# Altium PCB pcb.PcbDoc
Units mil, origin at the board's own origin, x right, y up, seen from the top; angles counter-clockwise.
Board outline 6000 x 4000 mil, 2 copper layers (Top Layer, Bottom Layer); 21 components, 21 nets, 122 pads, 0 vias.
Unrouted connection lines stored in the file: 63.
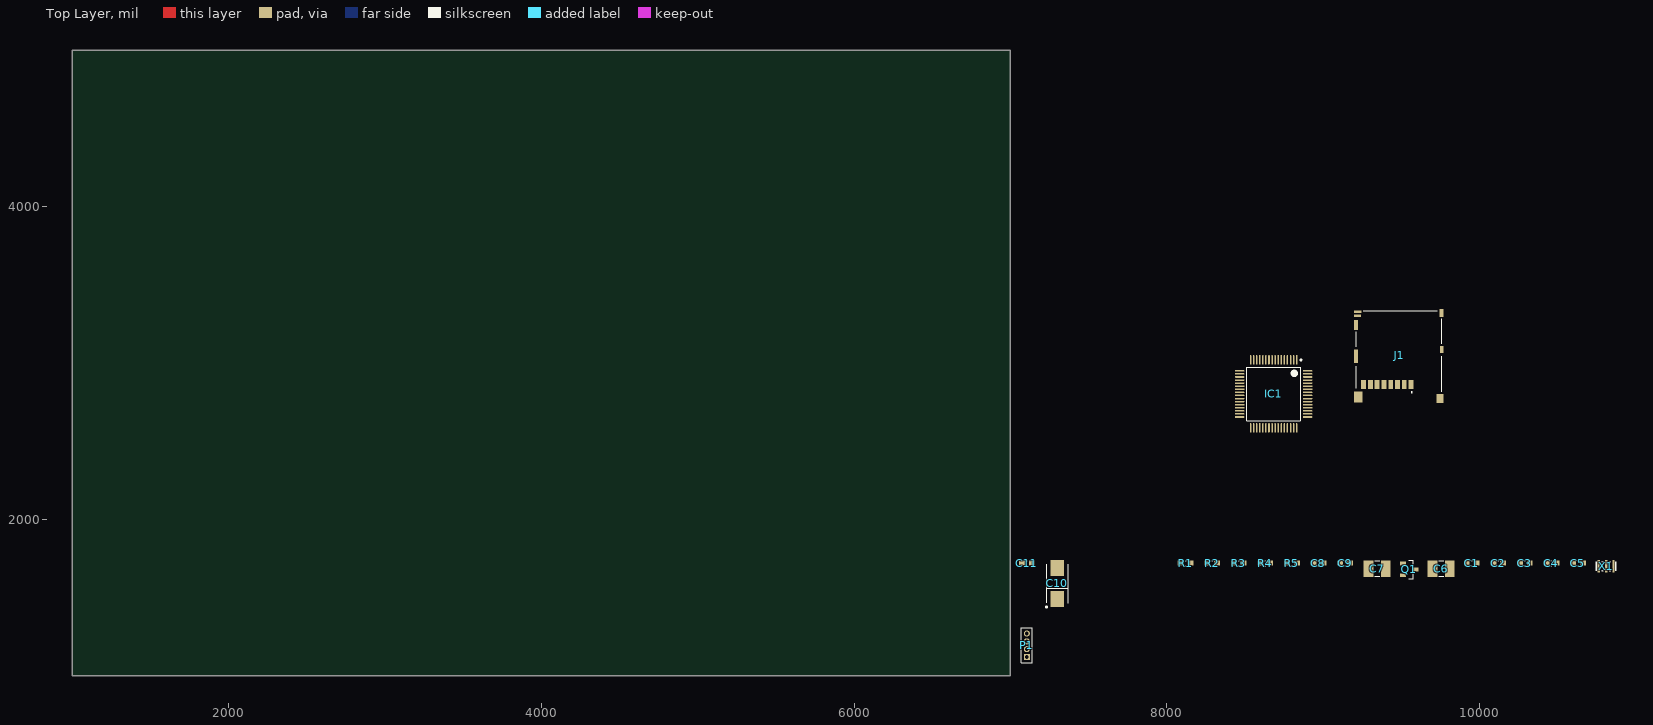
[diagram p0: Top Layer view]
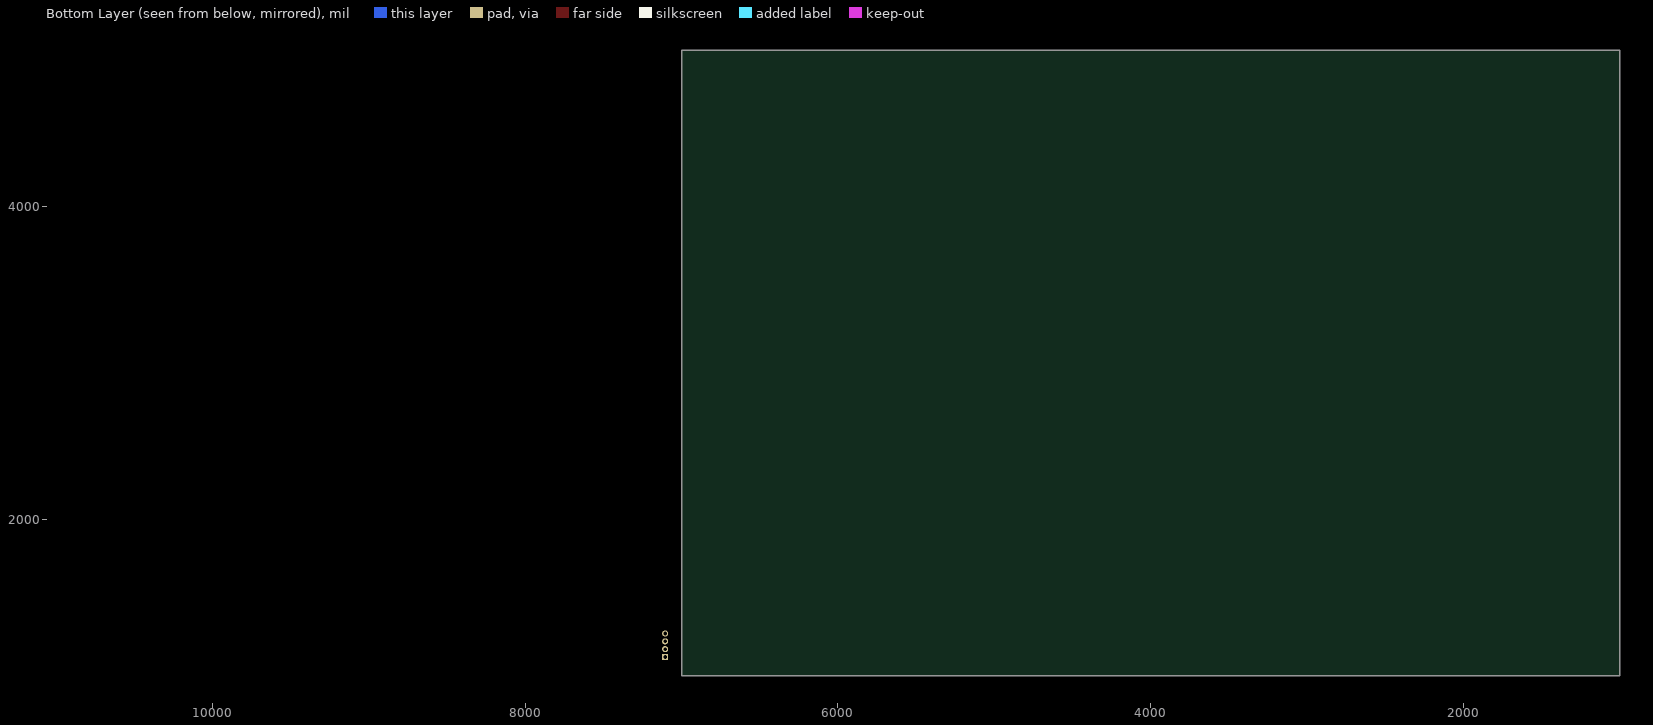
[diagram p1: Bottom Layer view, seen from below]

## Layer stack, top to bottom
Top Solder: solder mask 0.4, Solder Resist, Dk 3.5
Top Layer: signal copper 1.4
Dielectric 1: dielectric 12.6, FR-4, Dk 4.8
Bottom Layer: signal copper 1.4
Bottom Solder: solder mask 0.4, Solder Resist, Dk 3.5

## Board outline
1000,1000 7000,1000 7000,5000 1000,5000

## Design rules (kind name [scope] priority, off if disabled: settings)
Clearance [All] p1: gap=5 ignorepadtopadclearanceinfootprint=FALSE
PolygonConnect [All] p1: connectstyle=Relief reliefconductorwidth=10 reliefentries=4 polygonreliefangle="90 Angle" airgapwidth=10
RoutingVias [All] p1: holewidth=28 width=50 viastyle="Through Hole" minholewidth=28 minwidth=50 maxholewidth=28 maxwidth=50
SolderMaskExpansion [All] p1: expansion=4
Width [All] p1: maxlimit=10 minlimit=10 preferedwidth=10
30 further rules are at their usual default settings.

## Components (designator, comment, footprint, x,y, rotation, side; value= is the part's Value field where it differs from the comment)
C1 "100nF" RR_0603 9950,1720 r0 top value="CAP CER 0.1UF 25V X7R 0603"
C2 "100nF" RR_0603 10120,1720 r0 top value="CAP CER 0.1UF 25V X7R 0603"
C3 "100nF" RR_0603 10290,1720 r0 top value="CAP CER 0.1UF 25V X7R 0603"
C4 "100nF" RR_0603 10460,1720 r0 top value="CAP CER 0.1UF 25V X7R 0603"
C5 "100nF" RR_0603 10630,1720 r0 top value="CAP CER 0.1UF 25V X7R 0603"
C6 "Cap" RC_1210_T1.8 9755,1685 r0 top value=100pF
C7 "Cap" RC_1210_T1.8 9345,1685 r0 top value=100pF
C8 "2.2uF 25V" RC_0603 8970,1720 r0 top value="CAP CER 2.2UF 25V X5R 0603"
C9 "2.2uF 25V" RC_0603 9140,1720 r0 top value="CAP CER 2.2UF 25V X5R 0603"
C10 "220uF 6.3V" RR_CAP-C 7300,1590 r90 top value="CAP TANT POLY 220UF 6.3V 2312 15mOhm"
C11 "100nF" RR_0603 7105,1720 r0 top value="CAP CER 0.1UF 25V X7R 0603"
IC1 "STM32F405RGT6" RR_LQFP-64_L_ROUND 8683.27,2802.48 r270 top
J1 "MICROSD_2201778-1" RR_CONN_MICROSD_TE_2201778-1 9485,3050 r0 top value="MICRO SD PUSH PUSH LOW PROFILE T"
P1 "Header 4" MHDR1X4 7105,1120 r90 top value="1x4 100mil pitch header"
Q1 "IRLML2502" RR_SOT-23 9550,1680 r0 top value="MOSFET N-CH 20V 4.2A SOT-23-3"
R1 "4,7k" RR_0603 8120,1720 r0 top value="RES SMD 4K7 OHM 5% 1/10W 0603"
R2 "4,7k" RR_0603 8290,1720 r0 top value="RES SMD 4K7 OHM 5% 1/10W 0603"
R3 "4,7k" RR_0603 8460,1720 r0 top value="RES SMD 4K7 OHM 5% 1/10W 0603"
R4 "4,7k" RR_0603 8630,1720 r0 top value="RES SMD 4K7 OHM 5% 1/10W 0603"
R5 "4,7k" RR_0603 8800,1720 r0 top value="RES SMD 4K7 OHM 5% 1/10W 0603"
X1 "8MHz" RR_CRYSTAL_3.2X1.3 10810,1700 r0 top value="CER RES 8.0000MHZ 33PF SMD"

## Footprints (in the part's own frame and the unit in brackets; to place one, negate y for a bottom-side part, rotate by r counter-clockwise, add the part's x,y. Pads: shape width x height; smd on the part's side, far side on the other; paste and mask are expansions set on the pad)
MHDR1X4 [mm] "Connector; Header; 4 Position"
  rect 1x1 hole 0.6: 1(0,0)
  round 1 hole 0.6: 2(1.27,0) 3(2.54,0) 4(3.81,0)
  silkscreen extent -0.9,-0.9 4.71,0.9
RC_0603 [mil] "Chip Capacitor"
  rect 38x31 smd: 1(-31.5,0) 2(31.5,0)
  silkscreen extent -3,-17 3,17, body extent -33,-18 33,18, height 35
RC_1210_T1.8 [mm] "Chip Capacitor"
  rect 1.6x2.7 smd: 1(-1.4,0) 2(1.4,0)
  silkscreen extent -0.4,-1.25 0.4,1.25, body extent -1.75,-1.35 1.75,1.35, height 1.8
RR_0603 [mil] "Chip Resistor; Body 1.6 x 0.8 mm (LxW typ)"
  rect 38x31 smd: 1(-31.5,0) 2(31.5,0)
  silkscreen extent -3,-17 3,17, body extent -33,-18 33,18, height 22
RR_CAP-C [mm] "Capacitor, SM Tantalum; Body 6.0 x 3.2 mm (LxW typ)"
  rect 2.6x2.2 smd: 1(-2.5,0) 2(2.5,0)
  silkscreen extent -3.92,-1.75 3.15,1.87, body extent -3.1,-1.7 3.1,1.7, height 2.7
RR_CONN_MICROSD_TE_2201778-1 [mm]
  rect 0.8x1.4 smd: 1(1.965,-4.75) 2(0.865,-4.75) 3(-0.235,-4.75) 4(-1.335,-4.75) 5(-2.435,-4.75) 6(-3.535,-4.75) 7(-4.635,-4.75) 8(-5.735,-4.75)
  rect 1.15x0.45 smd: 9(-6.7,7.075)
  rect 1.1x0.45 smd: 10(-6.725,6.415)
  rect 1.35x1.8 smd: 11(-6.625,-6.8)
  rect 0.65x2.14 smd: 12(-6.95,-0.17)
  rect 0.65x1.6 smd: 13(-6.95,4.91)
  rect 0.65x1.3 smd: 14(6.95,6.85)
  rect 0.6x1.15 smd: 15(6.975,0.925)
  rect 1.16x1.5 smd: 16(6.695,-7.05)
  silkscreen extent -6.98,-6.11 6.98,7.2, body extent -6.98,-9 6.98,7.2, height 1.65
RR_CRYSTAL_3.2X1.3 [mm]
  rect 0.4x2 smd: 1(1.2,0) 2(0,0) 3(-1.2,0)
  silkscreen extent -1.6,-0.7 1.6,0.7, body extent -1.6,-0.65 1.6,0.65, height 0.7
RR_LQFP-64_L_ROUND [mm] "Thin QFP, 64-Leads, Body 10x10mm, Pitch 0.5mm, IPC High Density"
  oval 1.55x0.25 smd: 1(-5.525,3.75) 2(-5.525,3.25) 3(-5.525,2.75) 4(-5.525,2.25) 5(-5.525,1.75) 6(-5.525,1.25) 7(-5.525,0.75) 8(-5.525,0.25) 9(-5.525,-0.25) 10(-5.525,-0.75) 11(-5.525,-1.25) 12(-5.525,-1.75) 13(-5.525,-2.25) 14(-5.525,-2.75) 15(-5.525,-3.25) 16(-5.525,-3.75) 33(5.525,-3.75) 34(5.525,-3.25) 35(5.525,-2.75) 36(5.525,-2.25) 37(5.525,-1.75) 38(5.525,-1.25) 39(5.525,-0.75) 40(5.525,-0.25) 41(5.525,0.25) 42(5.525,0.75) 43(5.525,1.25) 44(5.525,1.75) 45(5.525,2.25) 46(5.525,2.75) 47(5.525,3.25) 48(5.525,3.75)
  oval 0.25x1.55 smd: 17(-3.75,-5.525) 18(-3.25,-5.525) 19(-2.75,-5.525) 20(-2.25,-5.525) 21(-1.75,-5.525) 22(-1.25,-5.525) 23(-0.75,-5.525) 24(-0.25,-5.525) 25(0.25,-5.525) 26(0.75,-5.525) 27(1.25,-5.525) 28(1.75,-5.525) 29(2.25,-5.525) 30(2.75,-5.525) 31(3.25,-5.525) 32(3.75,-5.525) 49(3.75,5.525) 50(3.25,5.525) 51(2.75,5.525) 52(2.25,5.525) 53(1.75,5.525) 54(1.25,5.525) 55(0.75,5.525) 56(0.25,5.525) 57(-0.25,5.525) 58(-0.75,5.525) 59(-1.25,5.525) 60(-1.75,5.525) 61(-2.25,5.525) 62(-2.75,5.525) 63(-3.25,5.525) 64(-3.75,5.525)
  silkscreen extent -5.65,-4.35 4.35,4.55, body extent -6,-6 6,6, height 1.5
RR_SOT-23 [mm] "SOT23, 3-Leads, Body 2.9x1.3mm, Pitch 0.95mm, Lead Span 2.3mm, IPC High Density"
  rect 1x0.6 smd: 1(-1,0.95) 2(-1,-0.95) 3(1,0)
  silkscreen extent -0.1,-1.5 0.7,1.5, body extent -1.33,-1.5 1.27,1.5, height 1.1

## Part data
C1 C2 C3 C4 C5 C11: library part CAP-0603-104-25V, "CAPACITOR CHIP", Manufacturer="Vishay Vitramon", Package=0603, Cost=0,07, Order number=VJ0603Y104KXXAC
C6 C7: "Capacitor", LatestRevisionDate=17-Jul-2002, LatestRevisionNote="Re-released for DXP Platform.", PackageDescription="Radial Cap, Thru-Hole; 2 Leads; 0.3 in Pin Spacing", PackageReference=RAD-0.3, Published=8-Jun-2000, Publisher="Altium Limited"
C8 C9: library part CAP-0603-225-25V, "CAPACITOR CHIP", Manufacturer=Murata, Package=0603, Cost=0,15, Order number=GRM188R61E225KA12D
C10: library part CAP-TANT-C-227-6.3V, "CAPACITOR TANTAL CASE C", Manufacturer=KEMET, Package="Case C", Cost=1,93, Order number=T520C227M006ATE015
IC1: library part STM32F405RGT6_RR, "STM32 ARM-based 32-bit MCU", Manufacturer=STMicroelectronics, Package=LQFP-64, Cost=10,58, Order number=STM32F405RGT6
J1: "MICRO SD PUSH PUSH LOW PROFILE TYPE", Manufacturer="TE Connectivity AMP Connectors", Cost=2,57, Order number=2201778-1
P1: "Header, 4-Pin"
Q1: "MOSFET N-CH 20V 4.2A SOT-23-3", Manufacturer="Infineon Technologies", Package=SOT-23, Cost=0,52, Order number="IRLML2502GTRPBF ( IRLML6246TRPBF (INFIN))"
R1 R2 R3 R4 R5: library part RES-0603-4K7-5%, "RESISTOR", Manufacturer="Panasonic Electronic Components", Package=0603, Cost=0.1, Order number=ERJ-PA3J472V
X1: library part CSTCE8M00G55-R0, "XTAL 8.0000MHZ 33PF SMD", Manufacturer="Murata Electronics", Package="3-SMD 3,2mm x 1,3mm", Cost=0,48, Order number=CSTCE8M00G55-R0

## Nets (pads, with @x,y where several pads share a name; then routed paths per layer and width w, separated by ;. In a path a pad name is that pad's centre, name@x,y a point inside that pad or via, vN(x,y) a via of type N, cw(c..) or ccw(c..) an arc to the next point about the centre after c; other vN are vias at no path point)
3V3: C1.2 C2.2 C3.2 C4.2 C7.2 C10.1 C11.1 IC1.1 IC1.13 IC1.19 IC1.32 IC1.48 IC1.64 J1.4 P1.1 Q1.2 R1.2 R2.2 R3.2 R4.2 R5.2
5V: C6.2 Q1.3
CAN_RX: IC1.61
CAN_TX: IC1.62
DM: IC1.44
DP: IC1.45
GND: C1.1 C2.1 C3.1 C4.1 C5.1 C6.1 C7.1 C8.2 C9.2 C10.2 C11.2 IC1.12 IC1.18 IC1.60 IC1.63 J1.6 J1.11 J1.12 J1.13 J1.14 J1.15 J1.16 P1.3 Q1.1 X1.2
NetC5_2: C5.2 IC1.7
NetC8_1: C8.1 IC1.47
NetC9_1: C9.1 IC1.31
NetIC1_5: IC1.5 X1.1
NetIC1_6: IC1.6 X1.3
SD_CLK: IC1.53 J1.5
SD_CMD: IC1.54 J1.3 R5.1
SD_D0: IC1.39 J1.7 R4.1
SD_D1: IC1.40 J1.8 R3.1
SD_D2: IC1.51 J1.1 R2.1
SD_D3: IC1.52 J1.2 R1.1
SWCLK: IC1.49 P1.2
SWDIO: IC1.46 P1.4
WS2812_OUT: IC1.56
pads on no net: IC1.2 IC1.3 IC1.4 IC1.8 IC1.9 IC1.10 IC1.11 IC1.14 IC1.15 IC1.16 IC1.17 IC1.20 IC1.21 IC1.22 IC1.23 IC1.24 IC1.25 IC1.26 IC1.27 IC1.28 IC1.29 IC1.30 IC1.33 IC1.34 IC1.35 IC1.36 IC1.37 IC1.38 IC1.41 IC1.42 IC1.43 IC1.50 IC1.55 IC1.57 IC1.58 IC1.59 J1.9 J1.10